# Altium PCB DeutschPCB.PcbDoc (part 2 of 2)
Units mil, origin at the board's own origin, x right, y up, seen from the top; angles counter-clockwise.
Board outline 2910 x 1625 mil, 2 copper layers (Top Layer, Bottom Layer), stack 61.8 mil thick; 103 components, 118 nets, 371 pads, 132 vias.
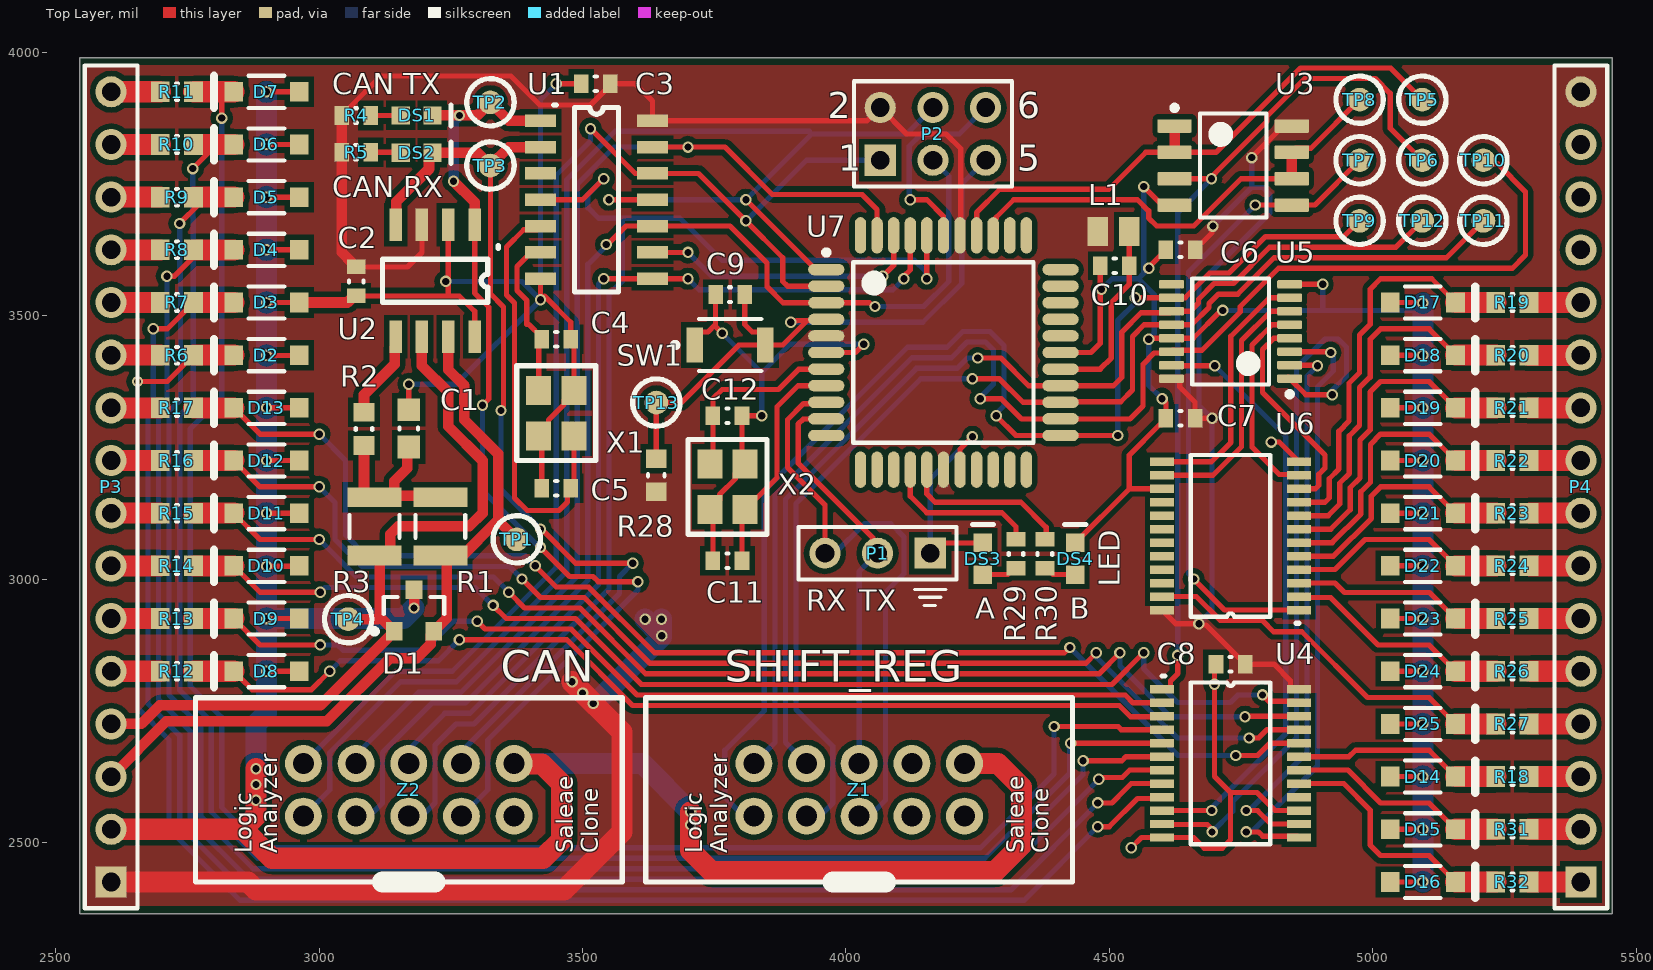
[diagram p0: Top Layer view]

## Silkscreen, mask and mechanical layers (free items; w line width, h text height) (continued)
Bottom Overlay: (continued)
  text "+5V" at 5325,3905 h40
  text "+5V" at 3995,3875 h40
  text "GND" at 4440,3875 h40
  text "GND" at 5325,3805 h40
  text "MISO" at 3995,3775 h40
  text "RESET" at 4520,3775 h40
  text "PROG" at 4275,3660 h60
  text "Shutdown Board" at 3735.54,3205.75 h60
  text "SERIAL" at 4225,3125 h60
  text "V2.1 - Mezzanine" at 3735.54,3115.75 h60
  text "RX" at 3995,2940 h40
  text "TX" at 4095,2940 h40
  text "CAN_N" at 2870,2705 h40
  text "CAN_P" at 2870,2605 h40
  text "GND" at 2785,2505 h40
  text "+5V" at 2785,2405 h40
BoardOutline:
  the board outline again, w10

## Text inside footprints (layer, text, board x,y; h text height)
P2: Top Overlay "6" at 4325,3875 h50; Top Overlay "5" at 4325,3775 h50; Top Overlay "2" at 3965,3875 h50; Top Overlay "1" at 3985,3775 h50
Z1: Top Overlay "Logic / Analyzer" at 3775,2479.85 h32 r90; Top Overlay "Saleae / Clone" at 4385,2479.85 h32 r90
Z2: Top Overlay "Saleae / Clone" at 3530,2479.85 h32 r90; Top Overlay "Logic / Analyzer" at 2920,2479.85 h32 r90